# Altium PCB Dano_PCB.PcbDoc
Units mm, origin at the board's own origin, x right, y up, seen from the top; angles counter-clockwise.
Board outline 28 x 55 mm, 2 copper layers (Top Layer, Bottom Layer); 26 components, 42 nets, 162 pads, 31 vias.
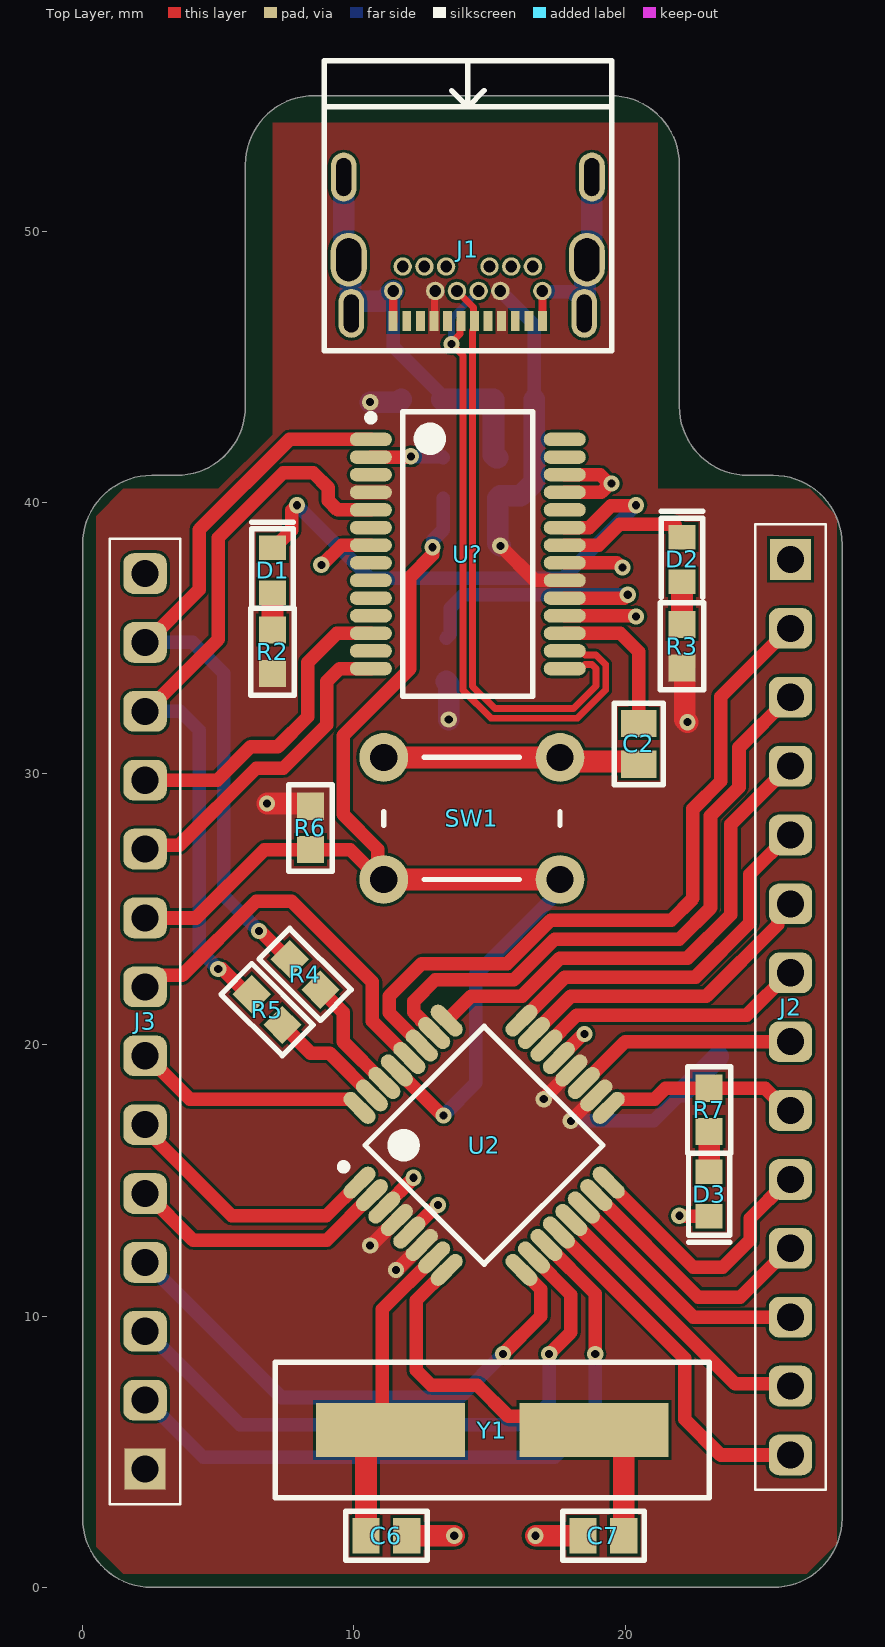
[diagram p0: Top Layer view]
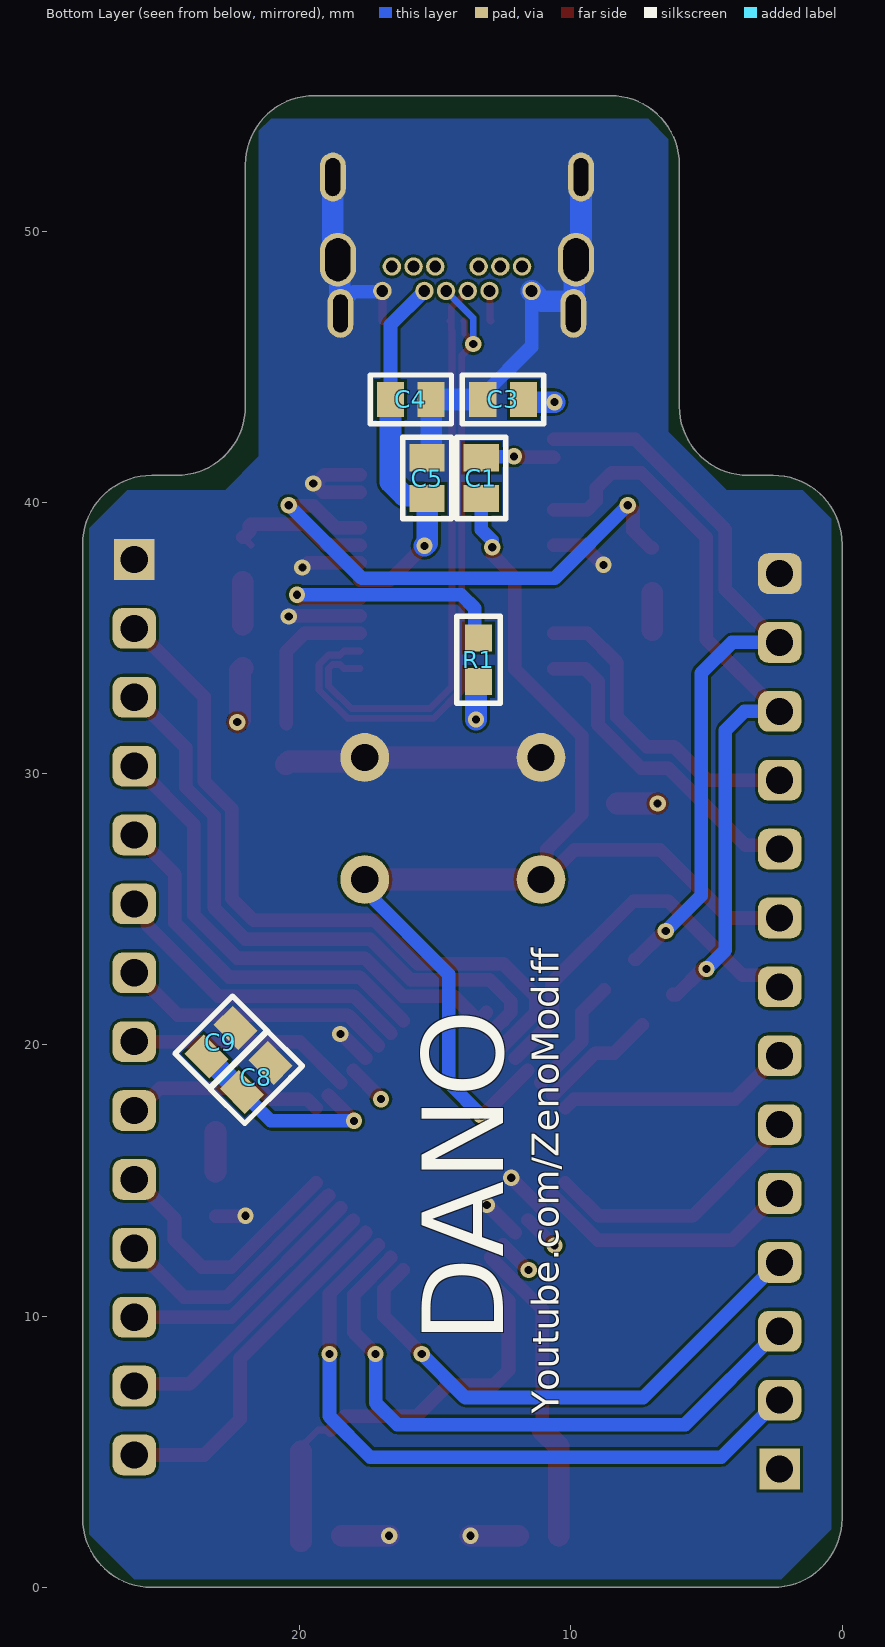
[diagram p1: Bottom Layer view, seen from below]
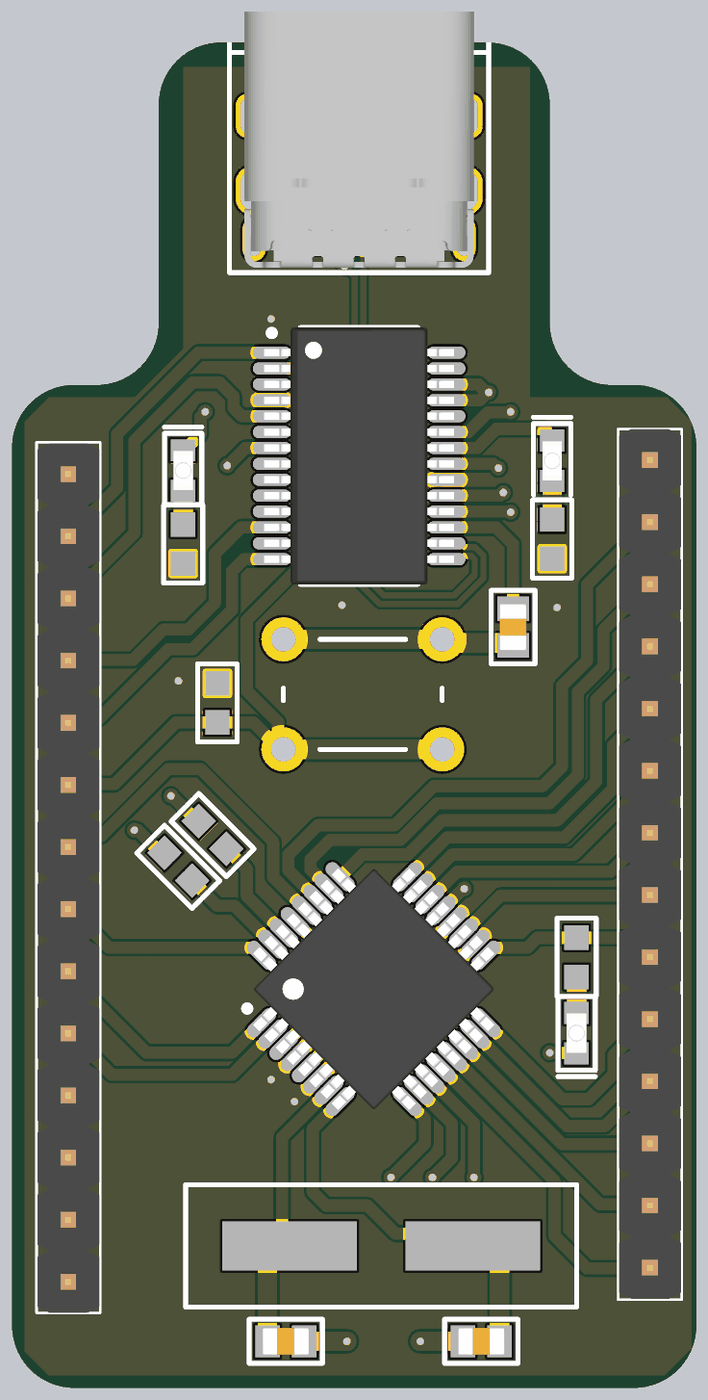
[diagram p2: 3D render of the assembled board from above, using the file's embedded part models]
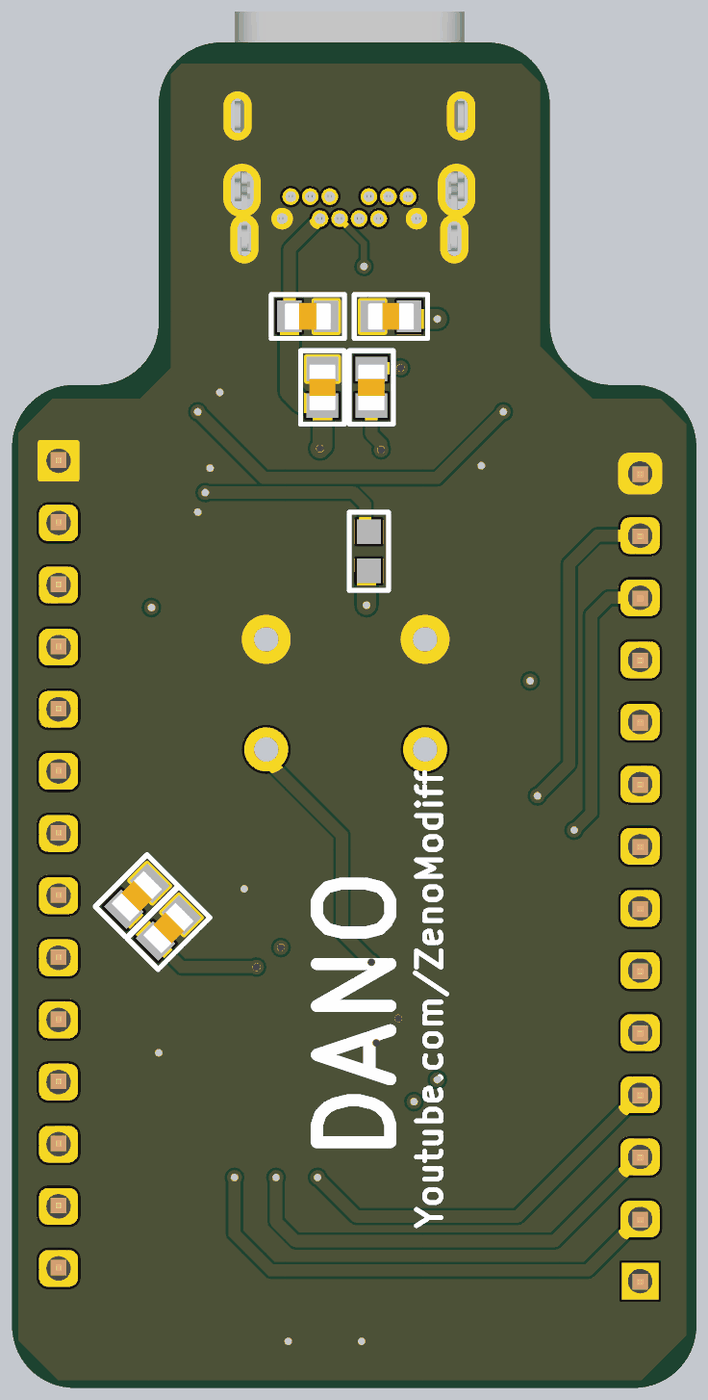
[diagram p3: 3D render of the assembled board from below, using the file's embedded part models]

## Layer stack, top to bottom
Top Solder: solder mask 0.0102, Solder Resist, Dk 3.5
Top Layer: signal copper 0.0356
Dielectric 1: dielectric 0.32, FR-4, Dk 4.8
Bottom Layer: signal copper 0.0356
Bottom Solder: solder mask 0.0102, Solder Resist, Dk 3.5

## Board outline
2.54,0 cw(c2.54,2.54) 0,2.54 0,38.46 cw(c2.54,38.46) 2.54,41 3.46,41 ccw(c3.46,43.54) 6,43.54 6,52.46 cw(c8.54,52.46) 8.54,55 19.46,55 cw(c19.46,52.46) 22,52.46 22,43.54 ccw(c24.54,43.54) 24.54,41 25.46,41 cw(c25.46,38.46) 28,38.46 28,2.54 cw(c25.46,2.54) 25.46,0

## Design rules (kind name [scope] priority, off if disabled: settings)
Clearance [All] p1: gap=0.1 ignorepadtopadclearanceinfootprint=FALSE
DiffPairsRouting [All] p1: maxlimit=0.254 minlimit=0.1 mostfreqgap=0.1 toplayer_minwidth=0.1 toplayer_maxwidth=1 toplayer_prefwidth=0.381 bottomlayer_minwidth=0.1 bottomlayer_maxwidth=1 bottomlayer_prefwidth=0.381 substack1={05B66C47-1D66-44D4-A8A9-B0ABC8885C68} toplayer_{05b66c47-1d66-44d4-a8a9-b0abc8885c68}_minwidth=0.381 toplayer_{05b66c47-1d66-44d4-a8a9-b0abc8885c68}_maxwidth=0.381 toplayer_{05b66c47-1d66-44d4-a8a9-b0abc8885c68}_prefwidth=0.381 bottomlayer_{05b66c47-1d66-44d4-a8a9-b0abc8885c68}_minwidth=0.381 bottomlayer_{05b66c47-1d66-44d4-a8a9-b0abc8885c68}_maxwidth=0.381 bottomlayer_{05b66c47-1d66-44d4-a8a9-b0abc8885c68}_prefwidth=0.381 maxuncoupledlength=12.7
HoleToHoleClearance [All] p1: gap=0.1 allowstackedmicrovias=TRUE
PolygonConnect [All] p1: connectstyle=Direct reliefconductorwidth=0.254 reliefentries=4 polygonreliefangle="90 Angle" airgapwidth=0.254
RoutingVias [All] p1: holewidth=0.711 width=1.27 viastyle="Through Hole" minholewidth=0.711 minwidth=1.27 maxholewidth=0.711 maxwidth=1.27
SolderMaskExpansion [All] p1: expansion=0.102 istentingtop=FALSE
UnRoutedNet [All] p1: checkbadconnections=TRUE
Width [All] p1: maxlimit=2 minlimit=0.1 preferedwidth=0.5 substack1={05B66C47-1D66-44D4-A8A9-B0ABC8885C68} minimp=50.000000 maximp=50.000000 favimp=50.000000
27 further rules are at their usual default settings.

## Classes and differential pairs
differential pair USBC: +USBC_P -USBC_N

## Components (designator, comment, footprint, x,y, rotation, side; value= is the part's Value field where it differs from the comment)
C1 "0.1uF(0603 in )" Capacitor_0603 13.3,40.9 r270 bottom
C2 "0.1uF(0603 in )" Capacitor_0603 20.5,31.1 r90 top
C3 "0.1uF(0603 in )" Capacitor_0603 12.5,43.8 r180 bottom
C4 "4.7uF (16V)" Capacitor_0603 15.9,43.8 r0 bottom
C5 "0.1uF(0603 in )" Capacitor_0603 15.3,40.9 r270 bottom
C6 "16pF(50V)" Capacitor_0603 11.2,1.9 r180 top
C7 "16pF(50V)" Capacitor_0603 19.2,1.9 r0 top
C8 "0.1uF(0603 in )" Capacitor_0603 21.6,18.8 r315 bottom
C9 "4.7uF (16V)" Capacitor_0603 22.9,20.1 r315 bottom
D1 "LED GREEN" 0603_LED 7,37.5 r90 top
D2 "LED GREEN" 0603_LED 22.1,37.9 r90 top
D3 "LED GREEN" 0603_LED 23.1,14.5 r270 top
J1 "USB TYPE-C" "USB TYPE C" 14.2,46.69 r180 top
J2 "1x14HDR" "1x14 HDR_P2.54" 26.1,37.9 r0 top
J3 "1x14HDR" "1x14 HDR_P2.54" 2.3,4.36 r180 top
R1 "10K" RESISTOR0603 13.4,34.2 r90 bottom
R2 "220R" RESISTOR0603 7,34.5 r90 top
R3 "220R" RESISTOR0603 22.1,34.7 r90 top
R4 "1K(0603 in )" RESISTOR0603 8.2,22.6 r315 top
R5 "1K(0603 in )" RESISTOR0603 6.8,21.3 r315 top
R6 "1K(0603 in )" RESISTOR0603 8.4,28 r90 top
R7 "220R" RESISTOR0603 23.1,17.6 r90 top
SW1 "SWITCH" "PushButton nf" 11.1,26.1 r0 top
U2 "ATMEGA328P" 32TQFP 14.8,16.3 r45 top
U? "FT232RL" SSOP28_ 14.2,38.1 r0 top
Y1 "16MHz" 16MHz_Oscillator 15.1,5.8 r180 top

## Footprints (in the part's own frame and the unit in brackets; to place one, negate y for a bottom-side part, rotate by r counter-clockwise, add the part's x,y. Pads: shape width x height; smd on the part's side, far side on the other; paste and mask are expansions set on the pad)
"1x14 HDR_P2.54" [mm]
  rect 1.5x1.5 hole 1: 1(0,0)
  rrect50% 1.6x1.5 hole 1: 2(0,-2.54) 3(0,-5.08) 4(0,-7.62) 5(0,-10.16) 6(0,-12.7) 7(0,-15.24) 8(0,-17.78) 9(0,-20.32) 10(0,-22.86) 11(0,-25.4) 12(0,-27.94) 13(0,-30.48) 14(0,-33.02)
  silkscreen extent -1.3,-34.3 1.3,1.3, body extent -1.27,-34.26 1.27,1.3, height 9.27
16MHz_Oscillator [mm]
  rect 5.5x2 smd: 1(-3.75,0) 2(3.75,0)
  silkscreen extent -8,-2.5 8,2.5
32TQFP [mm] "TQFP, 32-Leads, Body 7.00x7.00mm, Pitch 0.65mm, IPC Medium Density"
  oval 1.45x0.55 smd: 1(-4.225,2.275) 2(-4.225,1.625) 3(-4.225,0.975) 4(-4.225,0.325) 5(-4.225,-0.325) 6(-4.225,-0.975) 7(-4.225,-1.625) 8(-4.225,-2.275) 17(4.225,-2.275) 18(4.225,-1.625) 19(4.225,-0.975) 20(4.225,-0.325) 21(4.225,0.325) 22(4.225,0.975) 23(4.225,1.625) 24(4.225,2.275)
  oval 0.55x1.45 smd: 9(-2.275,-4.225) 10(-1.625,-4.225) 11(-0.975,-4.225) 12(-0.325,-4.225) 13(0.325,-4.225) 14(0.975,-4.225) 15(1.625,-4.225) 16(2.275,-4.225) 25(2.275,4.225) 26(1.625,4.225) 27(0.975,4.225) 28(0.325,4.225) 29(-0.325,4.225) 30(-0.975,4.225) 31(-1.625,4.225) 32(-2.275,4.225)
  silkscreen extent -4.35,-3.1 3.1,3.22, body extent -4.53,-4.53 4.53,4.53, height 1.2
0603_LED [mm] "SMD 0603 LED"
  rect 0.9x1 smd: 1(-0.825,0) 2(0.825,0)
  silkscreen extent -1.4,-0.76 1.78,0.76, body extent -0.8,-0.4 0.8,0.4, height 0.96
Capacitor_0603 [mm] "Capacitor with 0603 (1608 Metric) Footprint"
  rect 1x1.3 smd: 1(-0.75,0) 2(0.75,0)
  silkscreen extent -1.5,-0.9 1.5,0.9, body extent -0.95,-0.55 0.95,0.55, height 0.8
"PushButton nf" [mm]
  round 1.8 hole 1: 1(0,4.5) 2(0,0) 3(6.5,4.5) 4(6.5,0)
  silkscreen extent 0,0 6.5,4.5
RESISTOR0603 [mm]
  rect 1x1 smd: 1(-0.8,0) 2(0.8,0)
  silkscreen extent -1.6,-0.8 1.6,0.8, body extent -0.9,-0.45 0.9,0.45, height 0.45
SSOP28_ [mm] "SSOP28 Package"
  oval 1.55x0.5 smd: 1(-3.575,4.225) 2(-3.575,3.575) 3(-3.575,2.925) 4(-3.575,2.275) 5(-3.575,1.625) 6(-3.575,0.975) 7(-3.575,0.325) 8(-3.575,-0.325) 9(-3.575,-0.975) 10(-3.575,-1.625) 11(-3.575,-2.275) 12(-3.575,-2.925) 13(-3.575,-3.575) 14(-3.575,-4.225) 15(3.575,-4.225) 16(3.575,-3.575) 17(3.575,-2.925) 18(3.575,-2.275) 19(3.575,-1.625) 20(3.575,-0.975) 21(3.575,-0.325) 22(3.575,0.325) 23(3.575,0.975) 24(3.575,1.625) 25(3.575,2.275) 26(3.575,2.925) 27(3.575,3.575) 28(3.575,4.225)
  silkscreen extent -3.7,-5.25 2.4,5.25, body extent -3.89,-5.25 3.89,5.25, height 2
"USB TYPE C" [mm] "Footprint for usb  type c"
  oval 0.95x1.8 hole 0.55 slot 1.4 at 90 deg: 1(-4.295,-0.28) 2(4.295,-0.28) 5(-4.575,-5.31) 6(4.575,-5.31)
  oval 1.33x1.98 hole 0.93 slot 1.58 at 90 deg: 3(-4.39,-2.26) 4(4.39,-2.26)
  rect 0.33x0.73 smd: A1(-2.75,0) A2(-2.25,0) A3(-1.75,0) A4(-1.25,0) A5(-0.75,0) A6(-0.25,0) A7(0.25,0) A8(0.75,0) A9(1.25,0) A10(1.75,0) A11(2.25,0) A12(2.75,0)
  round 0.68 hole 0.43: B1(2.75,-1.11) B2(2.4,-2.01) B3(1.6,-2.01) B4(1.2,-1.11) B5(0.8,-2.01) B6(0.4,-1.11) B7(-0.4,-1.11) B8(-0.8,-2.01) B9(-1.2,-1.11) B10(-1.6,-2.01) B11(-2.4,-2.01) B12(-2.75,-1.11)
  silkscreen extent -5.3,-9.6 5.3,1.1, body extent -4.7,-9.57 4.7,0.9, height 5.79

## Part data
C1 C2 C3 C5 C8: library part C0603X104J4RECAUTO, "0.1µF ±5% 16V Ceramic Capacitor X7R 0603 (1608 Metric)", Max Temp=125°C, Min Temp=-55°C, Supplier Part Number=399-17843-1-ND, ComponentLink1Description="Supplier Link", ComponentLink1URL=https://www.digikey.com/en/products/detail/kemet/C0603X104J4RECAUTO/8640437, Manufacturer Part Number=C0603X104J4RECAUTO, Part Status=Active, Price=0.21
C4 C9: library part GRM188R61C475KE11D, "4.7µF ±10% 16V Ceramic Capacitor X5R 0603 (1608 Metric)", Manufacturer="Murata Electronics", MaxTemp=85°C, MinTemp=-55°C, SupplierPartNumber=490-10730-1-ND, ComponentLink1Description=SupplierURL, ComponentLink1URL=https://www.digikey.com/en/products/detail/murata-electronics/GRM188R61C475KE11D/4905341, ManufacturerPartNumber=GRM188R61C475KE11D, PartStatus=Active, Price=0.36, Supplier=Digikey
C6 C7: library part C0603C160J5GACAUTO, "16pF ±5% 50V Ceramic Capacitor C0G, NP0 0603 (1608 Metric)", Manufacturer=KEMET, MaxTemp=125°C, MinTemp=-55°C, SupplierPartNumber=399-15901-1-ND, ComponentLink1Description=SupplierURL, ComponentLink1URL=https://www.digikey.com/en/products/detail/kemet/C0603C160J5GACAUTO/7516135, ManufacturerPartNumber=C0603C160J5GACAUTO, PartStatus=Active, Price=0.34, Supplier=Digikey
D1 D2 D3: library part XZVG53W-8, "Green 570nm LED Indication - Discrete 2.1V 0603 (1608 Metric)", Max Temp=+85°C, Min Temp=-40°C, Supplier Part Number=1497-1215-1-ND, ComponentLink1Description="Supplier Link", ComponentLink1URL=https://www.digikey.com/en/products/detail/sunled/XZVG53W-8/4745971, Manufacturer Part Number=XZVG53W-8, Part Status=Active, Price=0.36
J1: library part C-ARA1-AK511, "USB-C (USB TYPE-C) USB 3.2 Gen 1 (USB 3.1 Gen 1, Superspeed (USB 3.0)) Receptacle Connector 24 Position Surface Mount, Right Angle; Through Hole", Manufacturer="CNC Tech", MaxTemp=85°C, MinTemp=-40°C, SupplierPartNumber=1175-1893-1-ND, ComponentLink1Description=SupplierURL, ComponentLink1URL=https://www.digikey.com/en/products/detail/cnc-tech/C-ARA1-AK511/8637927, ManufacturerPartNumber=C-ARA1-AK511, PartStatus=Active, Price=3.75, Supplier=Digikey
J2 J3: library part 61301411121, "Connector Header Through Hole 14 position 0.100\" (2.54mm)", Manufacturer="Würth Elektronik", MaxTemp=105°C, MinTemp=-40°C, SupplierPartNumber=732-5325-ND, ComponentLink1Description=SupplierURL, ComponentLink1URL=https://www.digikey.com/en/products/detail/würth-elektronik/61301411121/4846849, ManufacturerPartNumber=61301411121, PartStatus=Active, Price=0.74, Supplier=Digikey
R1: library part RMCF0603JT10K0, "10 kOhms ±5% 0.1W, 1/10W Chip Resistor 0603 (1608 Metric) Automotive AEC-Q200 Thick Film", Manufacturer="Stackpole Electronics Inc", MaxTemp=155°C, MinTemp=-55°C, SupplierPartNumber=RMCF0603JT10K0CT-ND, ComponentLink1Description=SupplierURL, ComponentLink1URL=https://www.digikey.com/en/products/detail/stackpole-electronics-inc/RMCF0603JT10K0/1758104, ManufacturerPartNumber=RMCF0603JT10K0, PartStatus=Active, Price=0.10, Supplier=Digikey
R2 R3 R7: library part RMCF0603JT220R, "220 Ohms ±5% 0.1W, 1/10W Chip Resistor 0603 (1608 Metric) Automotive AEC-Q200 Thick Film", Manufacturer="Stackpole Electronics Inc", MaxTemp=155°C, MinTemp=-55°C, SupplierPartNumber=RMCF0603JT220RCT-ND, ComponentLink1Description=SupplierURL, ComponentLink1URL=https://www.digikey.com/en/products/detail/stackpole-electronics-inc/RMCF0603JT220R/1758014, ManufacturerPartNumber=RMCF0603JT220R, PartStatus=Active, Price=0.10, Supplier=Digikey
R4 R5 R6: library part CR0603-16W-1001FT, "1 kOhms ±1% 0.063W, 1/16W Chip Resistor 0603 (1608 Metric)  Thick Film", Max Temp=155°C, Min Temp=-55°C, Supplier Part Number=2679-CR0603-16W-1001FTTR-ND, ComponentLink1Description="Supplier Link", ComponentLink1URL=https://www.digikey.com/en/products/detail/venkel/CR0603-16W-1001FT/12327254, Manufacturer Part Number=CR0603-16W-1001FT, Part Status=Active, Price=---
SW1: library part TL1105DF160Q, "Tactile Switch SPST-NO Top Actuated Surface Mount", Manufacturer=E-Switch, MaxTemp=70°C, MinTemp=-20°C, SupplierPartNumber=EG1865-ND, ComponentLink1Description=SupplierURL, ComponentLink1URL=https://www.digikey.com/en/products/detail/e-switch/TL1105DF160Q/271562, ManufacturerPartNumber=TL1105DF160Q, PartStatus=Active, Price=0.17, Supplier=Digikey
U2: library part ATMEGA328PB-AUR, "AVR AVR® ATmega, Functional Safety (FuSa) Microcontroller IC 8-Bit 20MHz 32KB (16K x 16) FLASH 32-TQFP (7x7)", Manufacturer="Microchip Technology", MaxTemp=85°C, MinTemp=-40°C, SupplierPartNumber=ATMEGA328PB-AURCT-ND, ComponentLink1Description=SupplierURL, ComponentLink1URL=https://www.digikey.com/en/products/detail/microchip-technology/ATMEGA328PB-AUR/5638753, ManufacturerPartNumber=ATMEGA328PB-AUR, PartStatus=Active, Price=1.56, Supplier=Digikey
U?: library part FT232RL-REEL, "USB Bridge, USB to UART USB 2.0 UART Interface 28-SSOP", Manufacturer="FTDI, Future Technology Devices International Ltd", MaxTemp=85°C, MinTemp=-40°C, SupplierPartNumber=768-1007-1-ND, ComponentLink1Description=SupplierURL, ComponentLink1URL=https://www.digikey.com/en/products/detail/ftdi-future-technology-devices-international-ltd/FT232RL-REEL/1836385, ManufacturerPartNumber=FT232RL-REEL, PartStatus=Active, Price=4.50, Supplier=Digikey
Y1: library part LFXTAL003237BULK, "16MHz ±30ppm Crystal 16pF 40 Ohms HC-49/US", Manufacturer="IQD Frequency Products", MaxTemp=60°C, MinTemp=-10°C, SupplierPartNumber=1923-1461-ND, ComponentLink1Description=SupplierURL, ComponentLink1URL=https://www.digikey.com/en/products/detail/iqd-frequency-products/LFXTAL003237BULK/8633749, ManufacturerPartNumber=LFXTAL003237BULK, PartStatus=Active, Price=0.54, Supplier=Digikey

## Via types
v1: diameter 0.6/0.6 (per signal layer), hole 0.3, Top Layer to Bottom Layer, tented both sides, 31 vias

## Nets (pads, with @x,y where several pads share a name; then routed paths per layer and width w, separated by ;. In a path a pad name is that pad's centre, name@x,y a point inside that pad or via, vN(x,y) a via of type N, cw(c..) or ccw(c..) an arc to the next point about the centre after c; other vN are vias at no path point)
+5V0: C3.2 C4.2 C5.2 C8.2 C9.2 J1.A4 J1.A9 J1.B4 J1.B9 J3.1 R1.1 R2.1 R3.1 R6.2 U2.4 U2.6 U2.18 U2.20 U?.4 U?.20 | length 33.3
  Top Layer w0.25: R6.2@8.3,28.9 R6.2
  Top Layer w0.254: J1.A9 12.975,46.715 12.975,47.775 J1.B4
  Top Layer w0.5: v1(10.6,12.6) 10.627,12.6 11.569,13.542 U2.4 ; v1(11.556,11.7) 11.579,11.7 U2.6 ; v1(15.4,38.4) 16.675,37.125 U?.20 ; v1(17,18) 17,18.027 18.017,19.044 U2.20 ; v1(18,17.2) U2.18
  Top Layer w0.8: v1(6.8,28.9) R6.2@8.3,28.9 ; R3.1 22.2,33.8 22.2,32 v1(22.3,31.9)
  Bottom Layer w0.5: J1.B9 16.65,46.55 C4.2 ; v1(18,17.2) 21.061,17.2 C8.2
  Bottom Layer w0.8: v1(10.6,43.699) 11.65,43.699 C3.2 ; R1.1 13.5,33.3 v1(13.5,31.999) ; v1(15.4,38.4) 15.3,38.5 C5.2 15.4,40.25 16.15,40.25 16.65,40.75 C4.2 ; C8.2 C9.2
ADC0: J2.6 U2.23 | length 11.6
  Top Layer w0.5: U2.23 18.002,21.8 23,21.8 25.627,24.427 25.627,24.777 J2.6@26.05,25.2
ADC1: J2.5 U2.24 | length 13.9
  Top Layer w0.254: J2.5@26.041,27.799 J2.5
  Top Layer w0.5: U2.24 17.783,22.5 22.6,22.5 24.6,24.5 24.6,26.29 26.041,27.731 J2.5@26.041,27.799
ADC2: J2.4 U2.25 | length 19
  Top Layer w0.5: U2.25@13.113,21.205 U2.25 14.325,21.8 16.2,21.8 17.6,23.2 22.3,23.2 23.9,24.8 23.9,28.13 26.05,30.28 J2.4
ADC3: J2.3 U2.26 | length 23.6
  Top Layer w0.254: U2.26@12.389,20.811 12.587,20.811 U2.26
  Top Layer w0.5: U2.26 12.962,20.45 12.213,21.199 12.213,21.613 13,22.4 15.9,22.4 17.4,23.9 22,23.9 23.15,25.05 23.15,28.45 24.2,29.5 24.2,30.97 26.05,32.82 J2.3
ADC4: J2.2 U2.27 | length 26.5
  Top Layer w0.5: U2.27 11.3,21.179 11.3,21.8 12.5,23 15.651,23 17.251,24.6 21.7,24.6 22.5,25.4 22.5,28.7 23.524,29.724 23.524,32.834 26.05,35.36 J2.2
ADC5: J3.8 U2.28 | length 14.3
  Top Layer w0.5: J3.8 2.723,22.563 3.663,22.563 6.4,25.3 7.7,25.3 10.68,22.32 10.68,20.88 U2.28
ADC6: J2.8 U2.19 | length 8.8
  Top Layer w0.254: J2.8@25.72,20.5 J2.8
  Top Layer w0.5: U2.19 19.999,20.12 J2.8
ADC7: J2.7 U2.22 | length 10.1
  Top Layer w0.254: J2.7@26.05,22.66 J2.7
  Top Layer w0.5: U2.22 18.221,21.1 24.49,21.1 J2.7@26.05,22.66
FT232_3V3: C2.2 U?.17 | length 5.7
  Top Layer w0.5: U?.17 19.825,35.175 20.5,34.5 C2.2
FT232_IO0: U?.13
FT232_IO1: J3.10 U?.14 | length 12
  Top Layer w0.5: J3.10 2.435,27.355 3.555,27.355 6.4,30.2 7.4,30.2 9,31.8 9,33.4 9.475,33.875 U?.14
FT232_IO2: J3.11 U?.12 | length 11.7
  Top Layer w0.5: J3.11 4.96,29.76 6.2,31 7.2,31 8.3,32.1 8.3,34.1 9.375,35.175 U?.12
FT232_RX: J3.12 R5.1 U?.5 | length 28
  Top Layer w0.5: J3.12 2.35,32.3 5,34.95 5,38.7 7.4,41.1 8.5,41.1 9.062,40.538 9.062,40.063 9.4,39.725 U?.5 ; v1(5,22.8) 5.15,22.8 6.1,21.85 6.234,21.85 R5.1
  Bottom Layer w0.5: J3.12 3.6,32.3 4.3,31.6 4.3,23.5 v1(5,22.8)
FT232_RX_LED: D2.2 U?.22 | length 5.4
  Top Layer w0.254: D2.2@21.8,38.425 D2.2
  Top Layer w0.5: U?.22 19.025,38.425 19.8,39.2 21.807,39.2 21.85,39.157 21.85,38.925 22.05,38.725 D2.2
FT232_TX: J3.13 R4.1 U?.1 | length 27.7
  Top Layer w0.5: J3.13 2.35,34.84 4.3,36.79 4.3,39 7.625,42.325 U?.1 ; v1(6.5,24.2) 6.55,24.2 7.584,23.166 R4.1
  Bottom Layer w0.5: J3.13 4.06,34.84 5.2,33.7 5.2,25.5 v1(6.5,24.2)
FT232_TX_LED: D1.2 U?.23 | length 19.7
  Top Layer w0.5: D1.2 7.05,38.325 7.709,38.984 7.709,39.709 v1(7.9,39.9) ; U?.23 18.675,39.075 19.481,39.881 20.381,39.881 v1(20.4,39.9)
  Bottom Layer w0.5: v1(7.9,39.9) 10.6,37.2 17.7,37.2 v1(20.4,39.9)
GND: C2.1 C3.1 C4.1 C5.1 C6.1 C7.1 C8.1 C9.1 D3.2 J1.1 J1.2 J1.3 J1.4 J1.5 J1.6 J1.A1 J1.A12 J1.B1 J1.B12 J2.1 J3.14 SW1.1 SW1.3 U2.3 U2.5 U2.21 U?.7 U?.18 U?.21 U?.25 U?.26 | length 54.5
  Top Layer w0.3: J1.A12 J1.B1 ; J1.A1 J1.B12
  Top Layer w0.5: v1(8.8,37.7) 8.827,37.7 9.552,38.425 U?.7 ; U2.3 11.123,14.012 v1@12.2,15.089 ; U2.5 12.056,13.083 13.073,14.1 v1(13.1,14.1) ; U2.21 17.571,19.517 18.435,20.381 v1@18.481,20.381 ; U?.18 20.348,35.825 20.373,35.8 v1(20.4,35.8) ; U?.21 19.698,37.775 19.873,37.6 v1(19.9,37.6) ; U?.25 19.126,40.375 19.432,40.681 19.088,41.025 U?.26 ; v1(22,13.699) 22.012,13.687 23.088,13.687 D3.2
  Top Layer w0.8: SW1.1 SW1.3 17.75,30.45 20.4,30.45 C2.1 ; C6.1 v1(13.7,1.9) ; v1(16.7,1.9) C7.1
  Bottom Layer w0.5: J1.B1 11.45,45.75 13.25,43.95 C3.1 ; J1.B12 16.984,47.766 18.003,47.766 18.495,47.273 J1.1
  Bottom Layer w0.8: J1.6 9.625,49.603 9.81,49.418 J1.4 9.876,48.884 9.876,46.999 J1.2 9.905,47.354 9.974,47.424 11.074,47.424 J1.B1 ; C3.1 C4.1 15.15,41.75 15.25,41.65 C5.1 ; J1.1 18.524,46.999 18.524,48.884 J1.3 18.59,49.418 18.775,49.603 J1.5
  other v1: 12.2,15.1 18.5,20.4 19.5,40.7
NetC1_1: C1.1 U?.2 | length 2.7
  Top Layer w0.5: U?.2 12.048,41.675 12.073,41.7 v1(12.1,41.7)
  Bottom Layer w0.5: v1(12.1,41.7) 12.119,41.681 13.269,41.681 C1.1
NetD1_1: D1.1 R2.2 | length 1.4
  Top Layer w0.8: R2.2 D1.1
NetD2_1: D2.1 R3.2 | length 1.6
  Top Layer w0.8: R3.2 D2.1
NetD3_1: D3.1 R7.1 | length 1.5
  Top Layer w0.8: D3.1 R7.1
NetR1_2: R1.2 U?.19 | length 10.3
  Top Layer w0.5: U?.19 19.975,36.475 v1(20.1,36.6)
  Bottom Layer w0.5: R1.2 13.55,35.15 13.55,36.107 14.043,36.6 v1(20.1,36.6)
NetR4_2: R4.2 U2.30 | length 4.4
  Top Layer w0.254: U2.30@11.102,18.598 U2.30
  Top Layer w0.5: R4.2 9.6,21.2 9.6,20.121 11.102,18.619 U2.30@11.102,18.598
NetR5_2: R5.2 U2.31 | length 4.4
  Top Layer w0.5: R5.2 8.4,19.7 9.102,19.7 U2.31
PB0: J2.14 U2.12 | length 13.1
  Top Layer w0.5: U2.12 22.2,8.44 22.2,6.2 23.52,4.88 J2.14@25.918,4.88
PB1: J2.13 U2.13 | length 10.6
  Top Layer w0.254: J2.13@26.02,7.5 J2.13
  Top Layer w0.5: U2.13 24.06,7.5 J2.13@26.02,7.5
PB2: J2.12 U2.14 | length 9.2
  Top Layer w0.5: U2.14 22.519,9.96 J2.12@26.05,9.96
PB3: J2.11 U2.15 | length 9.9
  Top Layer w0.254: J2.11@25.811,12.211 J2.11
  Top Layer w0.5: U2.15 22.698,10.7 24.25,10.7 26.05,12.5 J2.11
PB4: J2.10 U2.16 | length 9.9
  Top Layer w0.254: J2.10@26.05,14.906 26.05,15.04 J2.10
  Top Layer w0.5: U2.16 22.517,11.8 23.6,11.8 24.614,12.814 24.614,13.604 25.916,14.906 J2.10@26.05,14.906
PB5: J2.9 R7.2 U2.17 | length 7.3
  Top Layer w0.5: U2.17 19.714,17.997 21.087,17.997 21.49,18.4 R7.2 25.162,18.4 25.982,17.58 J2.9
PD2: J3.7 U2.32 | length 8.7
  Top Layer w0.5: J3.7 2.35,19.6 3.953,17.997 9.886,17.997 U2.32
PD3: J3.6 U2.1 | length 9.9
  Top Layer w0.5: J3.6 2.773,16.587 2.773,16.427 5.5,13.7 8.983,13.7 U2.1
PD4: J3.5 U2.2 | length 9.8
  Top Layer w0.5: J3.5 2.35,14.52 4.07,12.8 9.002,12.8 U2.2
PD5: J3.4 U2.9 | length 20.4
  Top Layer w0.254: U2.9 U2.9@16.497,11.386
  Top Layer w0.5: v1(15.5,8.6) 16.893,9.993 16.893,10.99 U2.9
  Bottom Layer w0.5: J3.4 2.35,11.98 7.33,7 13.9,7 v1(15.5,8.6)
PD6: J3.3 U2.10 | length 22.9
  Top Layer w0.5: U2.10 16.638,12.15 18,10.788 18,9.4 v1(17.2,8.6)
  Bottom Layer w0.5: J3.3 2.35,9.44 5.79,6 16.4,6 17.2,6.8 v1(17.2,8.6)
PD7: J3.2 U2.11 | length 25.3
  Top Layer w0.254: v1(18.9,8.6) v1@19,8.7
  Top Layer w0.5: U2.11 18.9,10.821 v1(18.9,8.6)
  Bottom Layer w0.5: J3.2 2.35,6.9 4.45,4.8 17.4,4.8 18.9,6.3 v1(18.9,8.6)
RESET: C1.2 J3.9 R6.1 SW1.2 SW1.4 U2.29 | length 45.5
  Top Layer w0.5: J3.9 4.18,24.68 6.7,27.2 R6.1 9.867,27.2 10.967,26.1 SW1.2 10.883,26.317 10.883,27.217 9.6,28.5 9.6,31.4 12.066,33.866 12.066,37.246 12.9,38.079 v1(12.9,38.35) ; U2.29 11.596,19.058 13.254,17.4 v1(13.3,17.4)
  Top Layer w0.8: SW1.2 SW1.4
  Bottom Layer w0.5: v1(12.9,38.35) 12.9,38.6 13.3,39 C1.2 ; v1(13.3,17.4) 14.5,18.6 14.5,22.6 SW1.4@17.6,25.7
USBC_N: J1.A7 J1.B7 U?.16 | length 25.1
  Top Layer w0.254: J1.A7 13.912,46.652 13.912,46.206 13.6,45.894 v1(13.6,45.843) 14.023,45.421 14.023,33.076 15.053,32.046 18.239,32.046 19.285,33.092 19.285,34.021 18.929,34.377 18.515,34.377 18.367,34.525 U?.16
  Bottom Layer w0.254: v1(13.6,45.843) 13.6,46.798 14.6,47.798 J1.B7
USBC_P: J1.A6 J1.B6 U?.15 | length 22
  Top Layer w0.254: J1.B6 13.8,47.798 14.412,47.186 J1.A6@14.412,46.728 ; J1.A6 14.412,46.652 14.412,46.376 14.377,46.341 14.377,33.223 15.2,32.4 18.092,32.4 18.931,33.239 18.931,33.874 18.782,34.023 18.515,34.023 18.367,33.875 U?.15
XTAL1: C6.2 U2.7 Y1.2 | length 11.3
  Top Layer w0.5: Y1.2@11.05,5.8 11.05,10.252 U2.7
  Top Layer w0.8: C6.2 10.45,5.2 Y1.2@11.05,5.8
XTAL2: C7.2 U2.8 Y1.1 | length 17
  Top Layer w0.254: Y1.1 19.327,5.8 Y1.1@20.2,4.927 ; C7.2 C7.2@20.2,2.15
  Top Layer w0.5: U2.8 12.3,10.583 12.3,8 12.85,7.45 14.55,7.45 15.7,6.3 18.35,6.3 Y1.1
  Top Layer w0.8: C7.2@19.948,1.71 Y1.1@19.948,5.01
pads on no net: J1.A2 J1.A3 J1.A5 J1.A8 J1.A10 J1.A11 J1.B2 J1.B3 J1.B5 J1.B8 J1.B10 J1.B11 U?.3 U?.6 U?.8 U?.9 U?.10 U?.11 U?.24 U?.27 U?.28

## Polygon pours and split planes (outlines as drawn)
+5V0 on Top Layer "+5V0_L01_P000" (solid, remove dead copper, pour order 0): 7,54 21.2,54 21.2,40.5 26.8,40.5 27.8,39.5 27.8,1.6 26.7,0.5 1.5,0.5 1,1 0.5,1.5 0.5,39.5 1.5,40.5 5,40.5 7,42.5
GND on Bottom Layer "GND_L02_P001" (solid, remove dead copper, pour order 1): 4.25,40.45 6.4,42.6 6.4,53.4 7.15,54.15 21.05,54.15 21.5,53.7 21.5,41.7 22.75,40.45 26.35,40.45 27.75,39.05 27.75,1.95 26.1,0.3 2.24,0.3 0.4,2.14 0.4,39.4 1.45,40.45

## Silkscreen, mask and mechanical layers (free items; w line width, h text height)
Bottom Overlay:
  text "DANO" at 12.5,9 h3 r270
  text "Youtube.com/ZenoModiff" at 10.443,6.4 h1 r270
EdgeCut:
  lines w0.1: 0,2.558 ccw(c2.558,2.558) 2.558,0 3,0 25.461,0 ccw(c25.461,2.539) 28,2.539 28,3 28,38.5 ccw(c25.5,38.5) 25.5,41 25,41 24.483,41 cw(c24.483,43.483) 22,43.483 22,52.461 ccw(c19.461,52.461) 19.461,55 19,55 8.539,55 ccw(c8.539,52.461) 6,52.461 6,52 6,43.539 cw(c3.461,43.539) 3.461,41 2.5,41 ccw(c2.5,38.5) 0,38.5 0,38 0,2.558